# Altium PCB PCB0814.PcbDoc (part 2 of 2)
Units mm, origin at the board's own origin, x right, y up, seen from the top; angles counter-clockwise.
Board outline 53.24 x 23.14 mm, 2 copper layers (Top Layer, Bottom Layer); 33 components, 51 nets, 167 pads, 151 vias.
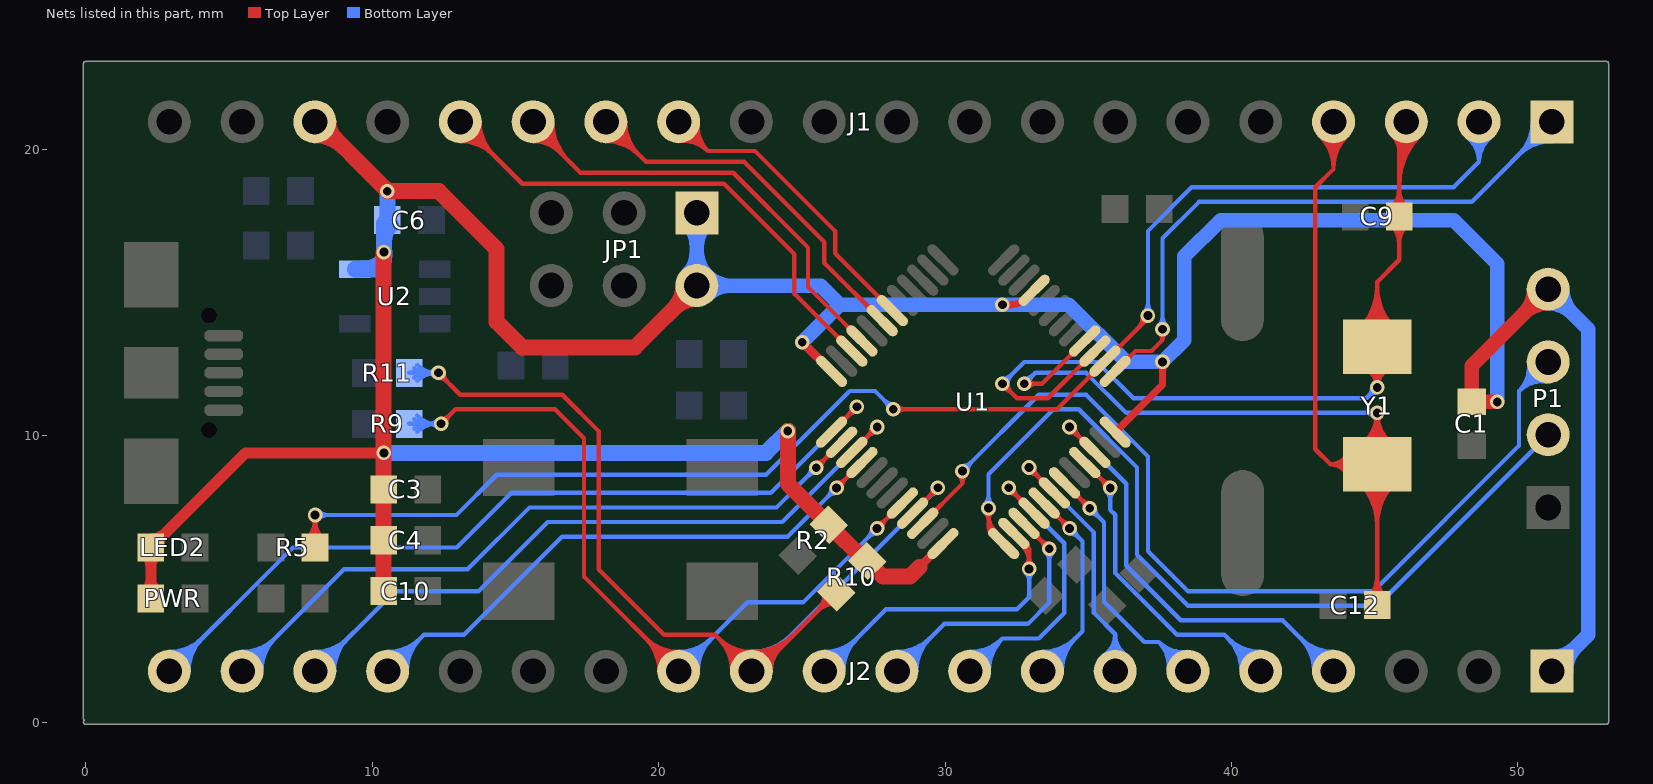
[diagram p2: the nets of this part, all layers, seen from the top]

## Via types
v1: diameter 0.508, hole 0.305, Top Layer to Bottom Layer, tented both sides, 151 vias

## Nets (pads, with @x,y where several pads share a name; then routed paths per layer and width w, separated by ;. In a path a pad name is that pad's centre, name@x,y a point inside that pad or via, vN(x,y) a via of type N, cw(c..) or ccw(c..) an arc to the next point about the centre after c; other vN are vias at no path point) (continued)
PA11: J2.13 R9.2 U1.32 | length 43.8
  Top Layer w0.152: v1(12.407,10.414) 12.915,10.922 16.383,10.922 17.399,9.906 17.399,5.08 J2.13@20.701,1.778 ; v1@12.407,10.592 ccw(c12.407,11.021) 12.711,10.718 ccw(c13.014,10.414) v1@12.585,10.414 ; J2.13@20.027,1.778 ccw(c18.401,1.778) 19.551,2.928 ccw(c20.701,4.078) J2.13@20.701,2.452 ; J2.13@20.18,1.778 ccw(c18.921,1.778) 19.811,2.668 ccw(c20.701,3.558) J2.13@20.701,2.299 ; J2.13@20.332,1.778 ccw(c19.441,1.778) 20.071,2.408 ccw(c20.701,3.038) J2.13@20.701,2.147 ; v1(27.627,6.763) U1.32@28.513,7.648 ; v1@27.627,6.94 ccw(c27.627,7.37) 27.931,7.066 ccw(c28.234,6.763) v1@27.805,6.763 ; U1.32@28.043,7.277 cw(c27.805,7.277) 27.973,7.109 cw(c28.142,6.94) U1.32@28.142,7.178
  Bottom Layer w0.152: R9.2@11.303,10.414 v1(12.407,10.414) ; R9.2@11.47,10.247 cw(c11.874,9.843) 11.874,10.414 cw(c11.874,10.985) R9.2@11.47,10.581 ; R9.2@11.578,10.139 cw(c12.242,9.475) 12.242,10.414 cw(c12.242,11.353) R9.2@11.578,10.689 ; v1@12.282,10.288 ccw(c11.978,9.985) 11.978,10.414 ccw(c11.978,10.843) v1@12.282,10.54 ; J2.13@20.701,1.778 23.114,4.191 25.056,4.191 v1(27.627,6.763) ; J2.13@20.701,2.147 ccw(c20.701,3.038) 21.331,2.408 ccw(c21.961,1.778) J2.13@21.07,1.778 ; J2.13@20.701,2.299 ccw(c20.701,3.558) 21.591,2.668 ccw(c22.481,1.778) J2.13@21.222,1.778 ; J2.13@20.701,2.452 ccw(c20.701,4.078) 21.851,2.928 ccw(c23.001,1.778) J2.13@21.375,1.778 ; v1@27.45,6.763 cw(c27.02,6.763) 27.324,6.459 cw(c27.627,6.156) v1@27.627,6.585
PA12: J2.12 R10.2 R11.2 U1.33 | length 59.2
  Top Layer w0.152: v1@12.319,12.014 cw(c12.319,11.585) 12.623,11.888 cw(c12.926,12.192) v1@12.497,12.192 ; v1(12.319,12.192) 13.081,11.43 16.637,11.43 17.907,10.16 17.907,5.334 20.193,3.048 21.971,3.048 J2.12@23.241,1.778 23.443,1.778 R10.2@26.201,4.536 ; J2.12@22.567,1.778 ccw(c20.941,1.778) 22.091,2.928 ccw(c23.241,4.078) 23.241,2.452 ccw(c23.241,4.567) 24.737,3.071 ; J2.12@22.72,1.778 ccw(c21.461,1.778) 22.351,2.668 ccw(c23.241,3.558) 23.241,2.299 ccw(c23.241,4.047) 24.476,2.811 ; J2.12@22.872,1.778 ccw(c21.981,1.778) 22.611,2.408 ccw(c23.241,3.038) 23.241,2.147 ccw(c23.241,3.526) 24.216,2.551 ; J2.12@23.241,1.995 ccw(c23.241,3.006) 23.956,2.291 ; J2.12@23.762,1.778 cw(c24.533,1.778) 23.988,2.323 ; J2.12@23.915,1.778 cw(c25.053,1.778) 24.248,2.583 ; R10.2@25.812,4.536 cw(c24.873,4.536) 25.537,3.872 cw(c26.201,3.208) R10.2@26.201,4.147 ; R10.2@25.964,4.536 cw(c25.394,4.536) 25.797,4.132 cw(c26.201,3.728) R10.2@26.201,4.299 ; U1.33@28.867,7.295 v1(29.752,8.181) ; U1.33@29.238,7.765 ccw(c29.238,8.003) 29.407,7.835 ccw(c29.575,7.666) U1.33@29.337,7.666 ; v1@29.575,8.181 cw(c29.145,8.181) 29.449,7.877 cw(c29.752,7.574) v1@29.752,8.003
  Bottom Layer w0.152: R11.2@11.303,12.192 v1(12.319,12.192) ; R11.2@11.47,12.025 cw(c11.874,11.621) 11.874,12.192 cw(c11.874,12.763) R11.2@11.47,12.359 ; R11.2@11.578,11.917 cw(c12.242,11.253) 12.242,12.192 cw(c12.242,13.131) R11.2@11.578,12.467 ; v1@12.193,12.066 ccw(c11.89,11.763) 11.89,12.192 ccw(c11.89,12.621) v1@12.193,12.318 ; J2.12@23.241,1.778 23.368,1.778 29.752,8.162 v1(29.752,8.181) ; J2.12@23.241,2.147 ccw(c23.241,3.344) 24.088,2.498 ; J2.12@23.241,2.299 ccw(c23.241,3.865) 24.348,2.758 ; J2.12@23.241,2.452 ccw(c23.241,4.385) 24.608,3.018 ; J2.12@23.762,1.778 cw(c24.715,1.778) 24.041,2.451 ; J2.12@23.915,1.778 cw(c25.235,1.778) 24.301,2.711 ; 29.436,7.846 ccw(c29.101,8.181) v1@29.575,8.181 ; 29.48,7.89 cw(c29.752,7.618) v1@29.752,8.003
PA15: J2.11 U1.38 | length 19.2
  Top Layer w0.152: U1.38@32.402,6.588 32.934,6.056 ; U1.38@32.704,6.147 cw(c32.146,5.589) v1@32.934,5.589 ; U1.38@32.777,6.118 cw(c32.784,5.905) 32.934,6.056 ; v1@32.809,5.474 ccw(c32.505,5.778) 32.934,5.778 ccw(c33.364,5.778) v1@33.06,5.474 ; U1.38@32.811,6.254 cw(c32.514,5.957) 32.934,5.957 ; U1.38@32.872,6.213 ccw(c33.085,6.206) 32.934,6.056 ; v1(32.934,5.349) 32.934,6.056
  Bottom Layer w0.152: J2.11@25.781,1.778 27.94,3.937 32.512,3.937 32.934,4.359 v1(32.934,5.349) ; J2.11@25.781,2.147 ccw(c25.781,3.038) 26.411,2.408 ccw(c27.041,1.778) J2.11@26.15,1.778 ; J2.11@25.781,2.299 ccw(c25.781,3.558) 26.671,2.668 ccw(c27.561,1.778) J2.11@26.302,1.778 ; J2.11@25.781,2.452 ccw(c25.781,4.078) 26.931,2.928 ccw(c28.081,1.778) J2.11@26.455,1.778 ; v1@32.809,5.223 cw(c32.505,4.919) 32.934,4.919 cw(c33.364,4.919) v1@33.06,5.223
PB0: J1.13 U1.18 | length 15.9
  Top Layer w0.152: J1.13@20.701,20.955 21.717,19.939 ; J1.13@20.735,20.588 cw(c20.795,19.936) 21.257,20.399 cw(c21.72,20.861) J1.13@21.068,20.921 ; J1.13@20.749,20.436 cw(c20.833,19.515) 21.487,20.169 cw(c22.141,20.823) J1.13@21.22,20.907 ; J1.13@20.763,20.284 cw(c20.872,19.094) 21.717,19.939 ; J1.13@21.372,20.893 ccw(c22.562,20.784) 21.717,19.939 ; U1.18@27.69,14.737 ccw(c27.451,14.737) 27.62,14.906 ccw(c27.788,15.075) U1.18@27.788,14.836 ; U1.18@28.16,14.366 26.162,16.364 26.162,17.145 23.368,19.939 21.717,19.939
PB1: J1.14 U1.19 | length 19.3
  Top Layer w0.152: J1.14@18.161,20.281 cw(c18.161,18.655) 19.311,19.805 cw(c20.461,20.955) J1.14@18.835,20.955 ; J1.14@18.161,20.434 cw(c18.161,19.175) 19.051,20.065 cw(c19.941,20.955) J1.14@18.682,20.955 ; J1.14@18.161,20.586 cw(c18.161,19.695) 18.791,20.325 cw(c19.421,20.955) J1.14@18.53,20.955 ; J1.14@18.161,20.955 19.558,19.558 22.987,19.558 25.787,16.758 25.787,16.031 U1.19@27.806,14.012 ; U1.19@27.336,14.384 ccw(c27.097,14.384) 27.266,14.552 ccw(c27.435,14.721) U1.19@27.435,14.482
PB3: J2.10 U1.39 | length 17.1
  Top Layer w0.152: U1.39@32.756,6.941 v1(33.642,6.056) ; U1.39@33.127,6.471 cw(c33.127,6.233) 33.296,6.401 cw(c33.464,6.57) U1.39@33.226,6.57 ; v1@33.464,6.056 ccw(c33.034,6.056) 33.338,6.359 ccw(c33.642,6.663) v1@33.642,6.233
  Bottom Layer w0.152: J2.10@28.321,1.778 29.972,3.429 32.893,3.429 33.642,4.178 v1(33.642,6.056) ; J2.10@28.321,2.147 ccw(c28.321,3.038) 28.951,2.408 ccw(c29.581,1.778) J2.10@28.69,1.778 ; J2.10@28.321,2.299 ccw(c28.321,3.558) 29.211,2.668 ccw(c30.101,1.778) J2.10@28.842,1.778 ; J2.10@28.321,2.452 ccw(c28.321,4.078) 29.471,2.928 ccw(c30.621,1.778) J2.10@28.995,1.778 ; v1@33.516,5.93 cw(c33.212,5.626) 33.642,5.626 cw(c34.071,5.626) v1@33.767,5.93
PB4: J2.9 U1.40 | length 18.2
  Top Layer w0.152: v1@32.224,8.003 cw(c32.224,7.574) 32.527,7.877 cw(c32.831,8.181) v1@32.401,8.181 ; v1(32.224,8.181) U1.40@33.109,7.295 ; U1.40@32.639,7.666 ccw(c32.401,7.666) 32.569,7.835 ccw(c32.738,8.003) U1.40@32.738,7.765
  Bottom Layer w0.152: J2.9@30.861,1.778 32.004,2.921 ; J2.9@30.863,2.147 ccw(c30.867,3.024) 31.487,2.404 ccw(c32.107,1.784) J2.9@31.23,1.78 ; J2.9@30.863,2.299 ccw(c30.869,3.539) 31.745,2.662 ccw(c32.622,1.786) J2.9@31.382,1.78 ; J2.9@30.864,2.452 ccw(c30.871,4.054) 32.004,2.921 ; J2.9@31.535,1.781 cw(c33.137,1.788) 32.004,2.921 ; v1@32.224,8.003 cw(c32.224,7.574) 32.527,7.877 cw(c32.831,8.181) v1@32.401,8.181 ; v1(32.224,8.181) 34.163,6.241 34.163,3.81 33.274,2.921 32.004,2.921
PB5: J2.8 U1.41 | length 14.7
  Top Layer w0.152: U1.41@33.463,7.648 v1(34.349,6.763) ; U1.41@33.834,7.178 cw(c33.834,6.94) 34.003,7.109 cw(c34.171,7.277) U1.41@33.933,7.277 ; v1@34.171,6.763 ccw(c33.742,6.763) 34.045,7.066 ccw(c34.349,7.37) v1@34.349,6.94
  Bottom Layer w0.152: J2.8@33.401,1.778 34.798,3.175 34.798,6.313 v1(34.349,6.763) ; J2.8@33.401,2.147 ccw(c33.401,3.038) 34.031,2.408 ccw(c34.661,1.778) J2.8@33.77,1.778 ; J2.8@33.401,2.299 ccw(c33.401,3.558) 34.291,2.668 ccw(c35.181,1.778) J2.8@33.922,1.778 ; J2.8@33.401,2.452 ccw(c33.401,4.078) 34.551,2.928 ccw(c35.701,1.778) J2.8@34.075,1.778 ; v1@34.349,6.585 cw(c34.349,6.156) 34.652,6.459 cw(c34.956,6.763) v1@34.526,6.763
PB6: J2.7 U1.42 | length 14.4
  Top Layer w0.152: v1@32.931,8.71 cw(c32.931,8.281) 33.234,8.584 cw(c33.538,8.888) v1@33.108,8.888 ; v1(32.931,8.888) U1.42@33.816,8.002 ; U1.42@33.346,8.373 ccw(c33.108,8.373) 33.277,8.542 ccw(c33.445,8.711) U1.42@33.445,8.472
  Bottom Layer w0.152: v1@32.931,8.71 cw(c32.931,8.281) 33.234,8.584 cw(c33.538,8.888) v1@33.108,8.888 ; v1(32.931,8.888) 35.197,6.622 35.197,3.81 35.941,3.066 ; J2.7@35.557,2.332 ccw(c35.047,3.066) 35.941,3.066 ; J2.7@35.644,2.206 ccw(c35.25,2.774) 35.941,2.774 ccw(c36.632,2.774) J2.7@36.238,2.206 ; J2.7@35.941,1.778 35.941,3.066 ; J2.7@36.325,2.332 cw(c36.835,3.066) 35.941,3.066
PB7: J2.6 U1.43 | length 15.3
  Top Layer w0.152: U1.43@34.17,8.356 v1(35.056,7.47) ; U1.43@34.541,7.886 cw(c34.541,7.647) 34.71,7.816 cw(c34.879,7.984) U1.43@34.64,7.984 ; v1@34.878,7.47 ccw(c34.449,7.47) 34.752,7.773 ccw(c35.056,8.077) v1@35.056,7.648
  Bottom Layer w0.152: v1@35.056,7.292 cw(c35.056,6.863) 35.359,7.166 cw(c35.663,7.47) v1@35.234,7.47 ; v1(35.056,7.47) 35.55,6.975 35.55,4.201 36.955,2.796 37.463,2.796 ; J2.6@37.81,1.839 ccw(c36.615,1.947) 37.464,2.796 ; J2.6@37.962,1.825 ccw(c37.037,1.909) 37.694,2.565 ccw(c38.35,3.222) J2.6@38.434,2.297 ; J2.6@38.114,1.811 ccw(c37.459,1.871) 37.924,2.335 ccw(c38.388,2.8) J2.6@38.448,2.145 ; J2.6@38.42,2.449 cw(c38.312,3.644) 37.463,2.795 ; J2.6@38.481,1.778 37.463,2.796
PB8: J2.5 U1.45 | length 18.5
  Top Layer w0.152: U1.45@34.877,9.063 v1(35.763,8.177) ; U1.45@35.248,8.593 cw(c35.248,8.354) 35.417,8.523 cw(c35.586,8.691) U1.45@35.347,8.691 ; v1@35.585,8.177 ccw(c35.156,8.177) 35.459,8.48 ccw(c35.763,8.784) v1@35.763,8.355
  Bottom Layer w0.152: v1@35.637,8.051 cw(c35.334,7.748) 35.763,7.748 cw(c36.192,7.748) v1@35.889,8.051 ; v1(35.763,8.177) 35.763,7.417 35.941,7.239 35.941,5.207 38.1,3.048 39.751,3.048 J2.5@41.021,1.778 ; J2.5@40.347,1.778 ccw(c38.721,1.778) 39.871,2.928 ccw(c41.021,4.078) J2.5@41.021,2.452 ; J2.5@40.5,1.778 ccw(c39.241,1.778) 40.131,2.668 ccw(c41.021,3.558) J2.5@41.021,2.299 ; J2.5@40.652,1.778 ccw(c39.761,1.778) 40.391,2.408 ccw(c41.021,3.038) J2.5@41.021,2.147
PB9: J2.4 U1.46 | length 23.3
  Top Layer w0.152: v1@34.345,10.124 cw(c34.345,9.695) 34.648,9.998 cw(c34.952,10.302) v1@34.523,10.302 ; v1(34.345,10.302) U1.46@35.231,9.416 ; U1.46@34.761,9.787 ccw(c34.522,9.787) 34.691,9.956 ccw(c34.859,10.125) U1.46@34.859,9.886
  Bottom Layer w0.152: v1@34.345,10.124 cw(c34.345,9.695) 34.648,9.998 cw(c34.952,10.302) v1@34.523,10.302 ; v1(34.345,10.302) 36.322,8.325 36.322,5.461 38.227,3.556 41.783,3.556 J2.4@43.561,1.778 ; J2.4@42.887,1.778 ccw(c41.261,1.778) 42.411,2.928 ccw(c43.561,4.078) J2.4@43.561,2.452 ; J2.4@43.04,1.778 ccw(c41.781,1.778) 42.671,2.668 ccw(c43.561,3.558) J2.4@43.561,2.299 ; J2.4@43.192,1.778 ccw(c42.301,1.778) 42.931,2.408 ccw(c43.561,3.038) J2.4@43.561,2.147
PB10: J1.15 U1.21 | length 21.4
  Top Layer w0.152: J1.15@15.621,20.281 cw(c15.621,18.961) 16.554,19.895 ; J1.15@15.621,20.434 cw(c15.621,19.481) 16.294,20.155 ; J1.15@15.621,20.955 15.621,20.828 17.272,19.177 22.606,19.177 25.219,16.564 25.219,15.186 U1.21@27.099,13.305 ; J1.15@15.99,20.955 ccw(c17.187,20.955) 16.341,20.108 ; J1.15@16.142,20.955 ccw(c17.708,20.955) 16.601,19.848 ; J1.15@16.295,20.955 ccw(c18.228,20.955) 16.861,19.588 ; U1.21@26.629,13.677 ccw(c26.39,13.677) 26.559,13.845 ccw(c26.728,14.014) U1.21@26.728,13.775
PB11: J1.16 U1.22 | length 24.1
  Top Layer w0.152: J1.16@13.081,20.281 cw(c13.081,18.655) 14.231,19.805 cw(c15.381,20.955) J1.16@13.755,20.955 ; J1.16@13.081,20.434 cw(c13.081,19.175) 13.971,20.065 cw(c14.861,20.955) J1.16@13.602,20.955 ; J1.16@13.081,20.586 cw(c13.081,19.695) 13.711,20.325 cw(c14.341,20.955) J1.16@13.45,20.955 ; J1.16@13.081,20.955 15.24,18.796 22.28,18.796 24.738,16.338 24.738,14.959 U1.22@26.745,12.952 ; U1.22@26.275,13.323 ccw(c26.037,13.323) 26.205,13.492 ccw(c26.374,13.66) U1.22@26.374,13.422
PB12: J2.20 U1.25 | length 36.7
  Top Layer w0.152: U1.25@26.038,10.123 v1(26.924,11.009) ; U1.25@26.409,10.593 ccw(c26.409,10.832) 26.578,10.663 ccw(c26.747,10.495) U1.25@26.508,10.495 ; v1@26.746,11.009 cw(c26.317,11.009) 26.62,10.706 cw(c26.924,10.402) v1@26.924,10.831
  Bottom Layer w0.152: J2.20@2.921,1.778 7.239,6.096 12.954,6.096 14.859,8.001 23.916,8.001 v1(26.924,11.009) ; J2.20@2.921,2.147 ccw(c2.921,3.038) 3.551,2.408 ccw(c4.181,1.778) J2.20@3.29,1.778 ; J2.20@2.921,2.299 ccw(c2.921,3.558) 3.811,2.668 ccw(c4.701,1.778) J2.20@3.442,1.778 ; J2.20@2.921,2.452 ccw(c2.921,4.078) 4.071,2.928 ccw(c5.221,1.778) J2.20@3.595,1.778 ; v1@26.746,11.009 cw(c26.317,11.009) 26.62,10.706 cw(c26.924,10.402) v1@26.924,10.831
PB13: J2.19 U1.26 | length 31.9
  Top Layer w0.152: v1(25.506,8.884) U1.26@26.392,9.77 ; v1@25.506,9.062 ccw(c25.506,9.491) 25.81,9.188 ccw(c26.113,8.884) v1@25.684,8.884 ; U1.26@25.922,9.399 cw(c25.683,9.399) 25.852,9.23 cw(c26.021,9.061) U1.26@26.021,9.3
  Bottom Layer w0.152: J2.19@5.461,1.778 9.017,5.334 13.335,5.334 15.494,7.493 24.115,7.493 v1(25.506,8.884) ; J2.19@5.461,2.147 ccw(c5.461,3.038) 6.091,2.408 ccw(c6.721,1.778) J2.19@5.83,1.778 ; J2.19@5.461,2.299 ccw(c5.461,3.558) 6.351,2.668 ccw(c7.241,1.778) J2.19@5.982,1.778 ; J2.19@5.461,2.452 ccw(c5.461,4.078) 6.611,2.928 ccw(c7.761,1.778) J2.19@6.135,1.778 ; v1@25.328,8.884 cw(c24.899,8.884) 25.203,8.581 cw(c25.506,8.277) v1@25.506,8.706
PB14: J2.18 U1.27 | length 32.1
  Top Layer w0.152: U1.27@26.745,9.416 v1(27.631,10.302) ; U1.27@27.117,9.886 ccw(c27.117,10.125) 27.285,9.956 ccw(c27.454,9.787) U1.27@27.215,9.787 ; v1@27.453,10.302 cw(c27.024,10.302) 27.328,9.998 cw(c27.631,9.695) v1@27.631,10.124
  Bottom Layer w0.152: J2.18@8.001,1.778 10.795,4.572 13.716,4.572 16.129,6.985 24.314,6.985 v1(27.631,10.302) ; J2.18@8.001,2.147 ccw(c8.001,3.038) 8.631,2.408 ccw(c9.261,1.778) J2.18@8.37,1.778 ; J2.18@8.001,2.299 ccw(c8.001,3.558) 8.891,2.668 ccw(c9.781,1.778) J2.18@8.522,1.778 ; J2.18@8.001,2.452 ccw(c8.001,4.078) 9.151,2.928 ccw(c10.301,1.778) J2.18@8.675,1.778 ; v1@27.453,10.302 cw(c27.024,10.302) 27.328,9.998 cw(c27.631,9.695) v1@27.631,10.124
PB15: J2.17 U1.28 | length 27.2
  Top Layer w0.152: v1(26.213,8.177) U1.28@27.099,9.063 ; v1@26.213,8.355 ccw(c26.213,8.784) 26.517,8.48 ccw(c26.82,8.177) v1@26.391,8.177 ; U1.28@26.629,8.691 cw(c26.39,8.691) 26.559,8.523 cw(c26.728,8.354) U1.28@26.728,8.593
  Bottom Layer w0.152: J2.17@10.541,1.778 11.811,3.048 13.208,3.048 16.637,6.477 24.513,6.477 v1(26.213,8.177) ; J2.17@10.541,2.147 ccw(c10.541,3.038) 11.171,2.408 ccw(c11.801,1.778) J2.17@10.91,1.778 ; J2.17@10.541,2.299 ccw(c10.541,3.558) 11.431,2.668 ccw(c12.321,1.778) J2.17@11.062,1.778 ; J2.17@10.541,2.452 ccw(c10.541,4.078) 11.691,2.928 ccw(c12.841,1.778) J2.17@11.215,1.778 ; v1@26.035,8.177 cw(c25.606,8.177) 25.91,7.873 cw(c26.213,7.57) v1@26.213,7.999
PC13: J1.2 R5.2 U1.2 | length 62.4
  Top Layer w0.152: R5.2@7.734,6.396 ccw(c7.07,7.06) 8.009,7.06 ccw(c8.948,7.06) R5.2@8.284,6.396 ; R5.2@7.842,6.288 ccw(c7.438,6.692) 8.009,6.692 ccw(c8.58,6.692) R5.2@8.176,6.288 ; v1@7.883,7.105 cw(c7.58,6.802) 8.009,6.802 cw(c8.438,6.802) v1@8.135,7.105 ; R5.2@8.009,6.096 v1(8.009,7.231) ; v1(28.194,10.922) 33.908,10.922 U1.2@35.584,12.598 37.084,14.098 v1(37.084,14.191) ; v1@28.32,10.796 cw(c28.623,10.493) 28.623,10.922 cw(c28.623,11.351) v1@28.32,11.048 ; U1.2@35.114,12.227 cw(c34.876,12.227) 35.044,12.058 cw(c35.213,11.89) U1.2@35.213,12.128 ; U1.2@35.955,13.068 ccw(c35.955,13.307) 36.124,13.138 ccw(c36.293,12.969) U1.2@36.054,12.969 ; 36.715,13.729 ccw(c36.252,14.191) v1@36.906,14.191 ; 36.939,13.953 cw(c37.084,13.809) v1@37.084,14.013
  Bottom Layer w0.152: v1(8.009,7.231) 12.946,7.231 14.351,8.636 23.749,8.636 26.67,11.557 27.559,11.557 v1(28.194,10.922) ; v1@8.135,7.105 cw(c8.438,6.802) 8.438,7.231 cw(c8.438,7.66) v1@8.135,7.357 ; v1@28.016,10.922 ccw(c27.587,10.922) 27.89,11.226 ccw(c28.194,11.529) v1@28.194,11.1 ; v1@36.958,14.317 ccw(c36.655,14.62) 37.084,14.62 ccw(c37.513,14.62) v1@37.21,14.317 ; v1(37.084,14.191) 37.084,17.145 38.608,18.669 47.752,18.669 48.641,19.558 ; J1.2@48.222,20.428 cw(c47.53,19.558) 48.641,19.558 ; J1.2@48.316,20.547 cw(c47.781,19.874) 48.641,19.874 cw(c49.501,19.874) J1.2@48.966,20.547 ; J1.2@48.411,20.666 cw(c48.032,20.19) 48.641,20.19 cw(c49.25,20.19) J1.2@48.871,20.666 ; J1.2@48.641,20.955 48.641,19.558 ; J1.2@49.06,20.428 ccw(c49.752,19.558) 48.641,19.558
PC14: C9.2 J1.3 U1.3 Y1.2 | length 55.8
  Top Layer w0.152: v1@32.004,11.633 cw(c32.004,11.204) 32.308,11.507 cw(c32.611,11.811) v1@32.182,11.811 ; v1(32.004,11.811) 32.512,11.303 33.582,11.303 U1.3@35.231,12.952 ; U1.3@34.761,12.581 cw(c34.522,12.581) 34.691,12.412 cw(c34.859,12.243) U1.3@34.859,12.482 ; Y1.2@44.467,13.717 ccw(c42.975,15.209) 45.085,15.209 ccw(c47.195,15.209) Y1.2@45.703,13.717 ; Y1.2@44.575,13.609 ccw(c43.343,14.841) 45.085,14.841 ccw(c46.827,14.841) Y1.2@45.595,13.609 ; Y1.2@44.683,13.501 ccw(c43.711,14.473) 45.085,14.473 ccw(c46.459,14.473) Y1.2@45.487,13.501 ; Y1.2@44.694,12.318 cw(c44.376,11.684) v1(45.085,11.684) ; Y1.2@44.762,12.454 cw(c44.5,11.931) 45.085,11.931 cw(c45.67,11.931) Y1.2@45.408,12.454 ; Y1.2@44.79,13.394 ccw(c44.079,14.105) 45.085,14.105 ccw(c46.091,14.105) Y1.2@45.38,13.394 ; v1@44.959,11.81 ccw(c44.656,12.113) 45.085,12.113 ccw(c45.514,12.113) v1@45.211,11.81 ; Y1.2@45.476,12.318 ccw(c45.794,11.684) v1(45.085,11.684) ; C9.2@45.58,17.353 cw(c44.916,16.689) 45.855,16.689 cw(c46.794,16.689) C9.2@46.13,17.353 ; C9.2@45.58,17.953 ccw(c44.916,18.617) 45.855,18.617 ccw(c46.794,18.617) C9.2@46.13,17.953 ; J1.3@45.625,20.479 cw(c45.068,19.922) 45.855,19.922 ; C9.2@45.688,17.461 cw(c45.284,17.057) 45.855,17.057 cw(c46.426,17.057) C9.2@46.022,17.461 ; C9.2@45.688,17.845 ccw(c45.284,18.249) 45.855,18.249 ccw(c46.426,18.249) C9.2@46.022,17.845 ; 45.855,18.734 cw(c48.322,18.734) J1.3@46.577,20.479 ; 45.855,19.102 cw(c47.954,19.102) J1.3@46.47,20.586 ; 45.855,19.47 cw(c47.586,19.47) J1.3@46.362,20.694 ; 45.855,19.838 cw(c47.218,19.838) J1.3@46.254,20.802 ; 45.855,20.206 cw(c46.85,20.206) J1.3@46.146,20.91 ; J1.3@46.101,20.955 45.855,20.709 C9.2@45.855,17.653 45.855,16.137 45.085,15.367 Y1.2@45.085,13.099 v1(45.085,11.684)
  Bottom Layer w0.152: v1(32.004,11.811) 32.766,12.573 35.306,12.573 36.576,11.303 44.704,11.303 v1(45.085,11.684) ; v1@32.004,11.989 ccw(c32.004,12.418) 32.308,12.115 ccw(c32.611,11.811) v1@32.182,11.811 ; v1@44.907,11.684 cw(c44.478,11.684) 44.781,11.38 cw(c45.085,11.077) v1@45.085,11.506
PC15: C12.2 J1.4 U1.4 Y1.1 | length 66.8
  Top Layer w0.152: v1(32.766,11.811) 33.383,11.811 U1.4@34.877,13.305 ; v1@32.892,11.685 cw(c33.195,11.382) 33.195,11.811 cw(c33.195,12.24) v1@32.892,11.937 ; U1.4@34.407,12.934 cw(c34.169,12.934) 34.337,12.765 cw(c34.506,12.597) U1.4@34.506,12.835 ; J1.4@43.085,20.479 cw(c41.934,19.328) 43.561,19.328 cw(c45.188,19.328) J1.4@44.037,20.479 ; J1.4@43.192,20.586 cw(c42.302,19.696) 43.561,19.696 cw(c44.82,19.696) J1.4@43.93,20.586 ; J1.4@43.3,20.694 cw(c42.67,20.064) 43.561,20.064 cw(c44.452,20.064) J1.4@43.822,20.694 ; J1.4@43.561,20.955 43.561,19.304 42.926,18.669 42.926,9.525 43.452,8.999 ; Y1.1@44.046,8.624 ccw(c43.452,8.342) 43.452,8.999 ; Y1.1@44.046,9.374 cw(c43.452,9.657) 43.452,8.999 ; Y1.1@44.183,8.689 ccw(c43.693,8.456) 43.693,8.999 ccw(c43.693,9.542) Y1.1@44.183,9.309 ; Y1.1@44.467,8.381 cw(c42.975,6.889) 45.085,6.889 cw(c47.195,6.889) Y1.1@45.703,8.381 ; Y1.1@44.546,9.687 ccw(c43.676,10.795) v1(45.085,10.795) ; Y1.1@44.575,8.489 cw(c43.343,7.257) 45.085,7.257 cw(c46.827,7.257) Y1.1@45.595,8.489 ; Y1.1@44.64,9.567 ccw(c43.922,10.482) 45.085,10.482 ccw(c46.248,10.482) Y1.1@45.53,9.567 ; Y1.1@44.683,8.597 cw(c43.711,7.625) 45.085,7.625 cw(c46.459,7.625) Y1.1@45.487,8.597 ; Y1.1@44.734,9.447 ccw(c44.168,10.168) 45.085,10.168 ccw(c46.002,10.168) Y1.1@45.436,9.447 ; Y1.1@44.79,8.704 cw(c44.079,7.993) 45.085,7.993 cw(c46.091,7.993) Y1.1@45.38,8.704 ; C12.2@44.81,4.386 ccw(c44.147,5.05) 45.085,5.05 ; C12.2@44.918,4.279 ccw(c44.514,4.682) 45.085,4.682 ccw(c45.656,4.682) C12.2@45.252,4.279 ; v1@44.959,10.669 cw(c44.656,10.366) 45.085,10.366 cw(c45.514,10.366) v1@45.211,10.669 ; C12.2@45.085,4.087 Y1.1@45.085,8.999 ; 45.085,5.05 ccw(c46.024,5.05) C12.2@45.36,4.386 ; Y1.1@45.624,9.687 cw(c46.494,10.795) v1(45.085,10.795) ; 43.452,8.999 Y1.1@45.085,8.999 ; Y1.1@45.085,8.999 v1(45.085,10.795)
  Bottom Layer w0.152: v1(32.766,11.811) 33.147,12.192 34.925,12.192 36.322,10.795 v1(45.085,10.795) ; v1@32.766,11.989 ccw(c32.766,12.418) 33.07,12.115 ccw(c33.373,11.811) v1@32.944,11.811 ; v1@44.959,10.669 ccw(c44.656,10.366) 44.656,10.795 ccw(c44.656,11.224) v1@44.959,10.921
SWCLK: P1.2 U1.37 | length 32.9
  Top Layer w0.152: v1@31.391,7.348 cw(c31.087,7.044) 31.516,7.044 cw(c31.946,7.044) v1@31.642,7.348 ; 31.516,6.865 ccw(c31.937,6.865) U1.37@31.64,6.568 ; v1@31.516,7.233 ccw(c32.305,7.233) U1.37@31.747,6.675 ; v1(31.516,7.474) 31.516,6.766 ; U1.37@31.579,6.609 ccw(c31.366,6.616) 31.516,6.766 ; U1.37@31.674,6.704 cw(c31.667,6.917) 31.516,6.766 ; U1.37@32.049,6.234 31.516,6.766
  Bottom Layer w0.152: v1@31.391,7.599 ccw(c31.087,7.903) 31.516,7.903 ccw(c31.946,7.903) v1@31.642,7.599 ; v1(31.516,7.474) 31.516,8.656 33.782,10.922 34.671,10.922 36.703,8.89 36.703,5.842 38.481,4.064 45.085,4.064 P1.2@51.054,10.033
SWIO: P1.3 U1.34 | length 39.7
  Top Layer w0.152: U1.34@29.22,6.941 30.607,8.328 v1(30.607,8.763) ; U1.34@29.591,7.411 ccw(c29.591,7.65) 29.76,7.481 ccw(c29.929,7.313) U1.34@29.69,7.313 ; v1@30.481,8.637 cw(c30.178,8.334) 30.607,8.334 cw(c31.036,8.334) v1@30.733,8.637
  Bottom Layer w0.152: v1(30.607,8.763) 33.274,11.43 34.925,11.43 37.084,9.271 37.084,5.969 38.481,4.572 44.958,4.572 50.038,9.652 50.038,11.557 ; v1@30.607,8.941 ccw(c30.607,9.37) 30.911,9.067 ccw(c31.214,8.763) v1@30.785,8.763 ; P1.3@50.383,12.511 cw(c49.193,12.402) 50.038,11.557 ; P1.3@50.535,12.525 cw(c49.614,12.441) 50.268,11.787 cw(c50.922,11.133) P1.3@51.006,12.054 ; P1.3@50.687,12.539 cw(c50.035,12.479) 50.498,12.017 cw(c50.96,11.554) P1.3@51.02,12.206 ; P1.3@50.992,11.902 ccw(c50.883,10.712) 50.038,11.557 ; P1.3@51.054,12.573 50.038,11.557
VBAT: J1.1 U1.1 | length 29.9
  Top Layer w0.152: U1.1@35.938,12.245 36.647,12.954 37.211,12.954 37.592,13.335 ; U1.1@36.309,12.715 ccw(c36.309,12.953) 36.478,12.785 ccw(c36.646,12.616) U1.1@36.408,12.616 ; v1@37.478,13.58 cw(c37.273,13.335) 37.592,13.335 ; v1(37.592,13.716) 37.592,13.335 ; v1@37.706,13.58 ccw(c37.911,13.335) 37.592,13.335
  Bottom Layer w0.152: v1@37.466,13.842 ccw(c37.163,14.145) 37.592,14.145 ccw(c38.021,14.145) v1@37.718,13.842 ; v1(37.592,13.716) 37.592,16.891 38.862,18.161 48.387,18.161 J1.1@51.181,20.955 ; J1.1@50.507,20.955 cw(c48.881,20.955) 50.031,19.805 cw(c51.181,18.655) J1.1@51.181,20.281 ; J1.1@50.66,20.955 cw(c49.401,20.955) 50.291,20.065 cw(c51.181,19.175) J1.1@51.181,20.434 ; J1.1@51.181,20.586 ccw(c51.181,19.695) J1.1@50.551,20.325 ; J1.1@50.551,20.325 ccw(c49.921,20.955) J1.1@50.812,20.955 ; J1.1@50.551,20.325 ccw(c49.921,20.955) J1.1@50.812,20.955 ; J1.1@50.551,20.325 ccw(c49.921,20.955) J1.1@50.812,20.955
VCC3V3: C1.1 C3.1 C4.1 C6.2 C10.2 J1.18 J2.1 JP1.1 JP1.2 LED2.A P1.4 PWR.A R2.2 R10.1 U1.9 U1.24 U1.36 U1.48 U2.5 | length 159.9
  Top Layer w0.152: R2.2@25.944,6.894 R2.2@26.02,6.894
  Top Layer w0.254: 32.303,14.569 ccw(c32.303,15.137) U1.9@32.704,14.736 ; U1.48@35.938,10.123 37.592,11.778 v1(37.592,12.573) ; v1@37.502,12.483 cw(c37.285,12.266) 37.592,12.266 cw(c37.899,12.266) v1@37.682,12.483
  Top Layer w0.305: v1(25.019,13.264) U1.24@26.038,12.245 ; 29.108,5.415 U1.36@29.927,6.234
  Top Layer w0.381: PWR.A@2.084,4.537 ccw(c1.615,5.006) 2.278,5.006 ccw(c2.941,5.006) PWR.A@2.472,4.537 ; LED2.A@2.084,5.877 cw(c1.615,5.408) 2.278,5.408 cw(c2.941,5.408) LED2.A@2.472,5.877 ; PWR.A@2.278,4.318 LED2.A@2.278,6.096 5.58,9.398 v1@10.406,9.398 ; LED2.A@2.278,6.395 ccw(c2.278,7.119) 2.789,6.607 ; LED2.A@2.552,6.121 cw(c3.155,6.121) LED2.A@2.729,6.547 ; C3.1@10.406,8.128 C3.1@10.414,8.136
  Top Layer w0.508: C1.1@48.238,11.333 ccw(c47.878,11.693) 48.387,11.693 ccw(c48.896,11.693) C1.1@48.536,11.333 ; C1.1@48.561,11.035 cw(c48.921,10.675) 48.921,11.184 cw(c48.921,11.693) C1.1@48.561,11.333 ; v1@49.268,11.184 C1.1@48.387,11.184 48.387,12.446 P1.4@51.054,15.113 ; P1.4@50.558,15.113 cw(c49.361,15.113) 50.207,14.266 cw(c51.054,13.42) P1.4@51.054,14.617
  Top Layer w0.559: J1.18@8.001,20.484 cw(c8.001,19.042) 9.021,20.062 ; J1.18@8.001,21.082 8.064,21.018 10.422,18.661 v1(10.533,18.534) 12.327,18.534 14.351,16.51 14.351,13.97 15.24,13.081 19.177,13.081 JP1.2@21.336,15.24 ; J1.18@8.472,20.955 ccw(c9.301,20.955) 8.715,20.368 ; C10.2@10.406,4.572 C4.1@10.406,6.349 C3.1@10.406,8.128 10.406,9.398 v1@10.406,16.375 ; JP1.2@20.865,15.24 cw(c19.729,15.24) 20.533,14.437 cw(c21.336,13.633) JP1.2@21.336,14.769 ; v1(24.511,10.16) 24.511,8.328 R2.2@25.944,6.894 27.215,5.624 R10.1@27.29,5.624 27.834,5.08 28.773,5.08 29.108,5.415 ; 26.827,6.012 ccw(c27.272,6.458) R10.1@27.272,5.828
  Bottom Layer w0.508: JP1.2@20.985,15.591 ccw(c20.139,16.437) 21.336,16.437 ccw(c22.533,16.437) 21.687,15.591 ccw(c22.533,16.437) 22.533,15.24 ccw(c22.533,14.043) JP1.2@21.687,14.889 ; JP1.1@20.985,17.429 cw(c20.139,16.583) 21.336,16.583 cw(c22.533,16.583) JP1.1@21.687,17.429 ; JP1.1@21.336,17.78 JP1.2@21.336,15.24 25.654,15.24 26.325,14.569 ; v1(25.019,13.264) 26.325,14.569 ; v1(49.276,11.176) 49.276,16.002 47.752,17.526 39.624,17.526 38.354,16.256 38.354,13.335 v1(37.592,12.573) 36.322,12.573 34.326,14.569 v1(32.004,14.569) 26.325,14.569 ; P1.4@51.054,14.617 cw(c51.054,13.42) 51.901,14.266 cw(c52.747,15.113) P1.4@51.55,15.113 ; P1.4@51.054,15.113 52.451,13.716 52.451,3.048 J2.1@51.181,1.778 ; J2.1@51.181,2.274 ccw(c51.181,3.471) 52.028,2.625 ccw(c52.874,1.778) J2.1@51.677,1.778
  Bottom Layer w0.559: U2.5@9.395,15.809 10.094,15.809 10.414,16.129 ; U2.5@9.646,15.83 ccw(c9.689,16.854) 10.414,16.129 ; 10.259,15.974 ccw(c9.825,16.409) v1@10.439,16.409 ; v1(10.414,9.398) 23.749,9.398 v1(24.511,10.16) ; 10.414,16.766 cw(c11.268,16.766) C6.2@10.664,17.37 ; v1(10.533,18.534) C6.2@10.533,17.526 10.414,17.407 v1(10.414,16.409) 10.414,16.129
VCC3V5: 
pads on no net: SW1.1 SW1.3 USB1.6 USB1.7 USB1.8

## Polygon pours and split planes (outlines as drawn)
GND on Bottom Layer "Top Layer-No Net" (solid, remove dead copper, pour order 16): 0,22.987 53.086,22.987 53.086,0 0,0
GND on Bottom Layer "NONET_L02_P014" (solid, remove dead copper, pour order 14): 0,22.987 53.086,22.987 53.086,-0.127 0.127,-0.127 0,0

## Keep-outs
Keep-Out Layer:
  lines w0.152: 0,0 53.086,0 53.086,22.987 0,22.987 0,0.127

## Other copper
Bottom Layer:
  rectangle net GND: 50.405,16.201 52.705,19.685
  pour cut-out: 35.052,14.831 36.83,14.859 37.008,14.586 37.008,13.033 36.929,12.954 35.179,12.954 35.052,13.081
  pour cut-out: 6.082,22.352 6.096,22.338 6.096,20.447 50.673,20.447 51.181,20.955 51.181,22.987 6.096,22.987
  pour cut-out: 8.255,10.093 8.695,9.653 9.399,9.653 10.16,10.414 10.16,14.351 9.779,14.732 8.255,14.732
  pour cut-out: 23.749,19.177 22.606,18.034 22.606,15.719 22.388,15.501 21.075,15.501 20.447,16.129 20.447,19.177
  pour cut-out: 44.196,4.318 44.196,2.286 43.815,1.905 43.326,1.905 42.661,2.57 42.661,4.307 42.672,4.318
  pour cut-out: 26.325,14.569 28.865,14.569 29.21,14.224 29.21,11.557 28.829,11.176 26.162,11.176 25.654,11.684 25.654,13.899

## Silkscreen, mask and mechanical layers (free items; w line width, h text height)
Top Overlay:
  lines w0.2: 9.271,4.064 9.271,12.827 13.081,12.827 13.081,3.81 ; 14.986,16.51 28.702,16.51 ; 24.257,13.97 24.257,19.05 ; 24.257,13.97 13.081,13.97 13.081,19.05 24.257,19.05 ; 24.257,13.97 26.162,13.97 28.702,16.51 ; 24.257,19.05 28.702,19.05 28.702,16.51
  text "BOOT0" at 24.511,17.78 h0.64
  text "GND" at 3.302,17.272 h0.76 r90
  text "GND" at 5.842,17.272 h0.76 r90
  text "3V3" at 8.382,17.272 h0.76 r90
  text "RST" at 10.922,17.272 h0.76 r90
  text "BOOT1" at 24.511,15.367 h0.64
  text "RESET" at 17.018,10.16 h0.76
  text "SWD" at 49.657,4.572 h1.02
Bottom Overlay:
  rectangle: 24.765,13.589 44.831,14.478
  rectangle: 44.069,8.636 44.831,14.478
  rectangle: 24.765,8.636 44.831,9.525
  rectangle: 24.765,8.636 25.527,14.478
  lines w0.2: 0.254,22.479 0.254,17.526 9.017,17.526 9.017,18.669 22.479,18.669 22.479,16.383 45.339,16.383 ; 1.651,0.508 1.651,6.858 44.577,6.858 45.212,6.223 52.451,6.223 52.451,0.508 ; 52.451,16.891 52.451,22.225 ; 52.705,6.604 45.339,6.604 45.339,16.383 ; 52.705,16.383 45.339,16.383
  text "GND" at 5.588,21.971 h0.76
  text "3V3" at 8.89,21.971 h0.76
  text "RST" at 11.557,21.971 h0.76
  text "PB1" at 18.796,21.971 h0.76
  text "PB0" at 21.59,21.971 h0.76
  text "GND" at 0.635,19.939 h0.76 r270
  text "PB11" at 13.589,19.05 h0.76
  text "PB10" at 17.018,19.05 h0.76
  text "PA7" at 22.987,16.764 h0.76 r270
  text "PA6" at 25.4,16.764 h0.76 r270
  text "PA5" at 27.813,16.764 h0.76 r270
  text "PA4" at 30.353,16.764 h0.76 r270
  text "PA3" at 32.893,16.764 h0.76 r270
  text "PA2" at 35.56,16.764 h0.76 r270
  text "PA1" at 38.1,16.767 h0.76 r270
  text "PA0" at 40.513,16.764 h0.76 r270
  text "PC15" at 43.18,16.764 h0.76 r270
  text "PC14" at 45.72,16.767 h0.76 r270
  text "PC13" at 48.26,16.767 h0.76 r270
  text "VBAT" at 50.8,16.637 h0.76 r270
  text "3V3" at 49.276,14.605 h0.76
  text "SWDIO" at 49.276,12.065 h0.76
  text "STM32F103C8T6-V1.0" at 43.561,11.938 h1.02
  text "MCU Core Board" at 42.037,10.16 h1.02
  text "SWCLK" at 49.276,9.525 h0.76
  text "GND" at 49.276,6.985 h0.76
  text "PB12" at 2.413,3.429 h0.76 r270
  text "PB13" at 4.826,3.429 h0.76 r270
  text "PB14" at 7.493,3.429 h0.76 r270
  text "PB15" at 9.906,3.429 h0.76 r270
  text "PA8" at 12.573,3.429 h0.76 r270
  text "PA9" at 14.986,3.429 h0.76 r270
  text "PA10" at 17.653,3.429 h0.76 r270
  text "PA11" at 20.066,3.429 h0.76 r270
  text "PA12" at 22.733,3.429 h0.76 r270
  text "PA15" at 25.146,3.429 h0.76 r270
  text "PB3" at 27.813,3.429 h0.76 r270
  text "PB4" at 30.226,3.429 h0.76 r270
  text "PB5" at 32.893,3.429 h0.76 r270
  text "PB6" at 35.306,3.429 h0.76 r270
  text "PB7" at 37.973,3.429 h0.76 r270
  text "PB8" at 40.386,3.429 h0.76 r270
  text "PB9" at 43.053,3.429 h0.76 r270
  text "5V" at 45.593,3.429 h0.76 r270
  text "GND" at 48.006,3.429 h0.76 r270
  text "3V3" at 50.673,3.429 h0.76 r270

## Dimensions
0,22.987 to 53.086,22.987 on Top Overlay
53.086,22.987 to 53.086,0 on Top Overlay

## Text inside footprints (layer, text, board x,y; h text height)
JP1: Top Overlay "1" at 23.241,17.145 h1.27; Top Overlay "1" at 23.241,14.478 h1.27; Top Overlay "0" at 13.589,17.018 h1.27; Top Overlay "0" at 13.589,14.478 h1.27